# Altium PCB sigmaDeltaAUX.PcbDoc
Units mm, origin at the board's own origin, x right, y up, seen from the top; angles counter-clockwise.
Board outline 100 x 100.07 mm, 2 copper layers (Top Layer, Bottom Layer); 68 components, 44 nets, 244 pads, 40 vias.
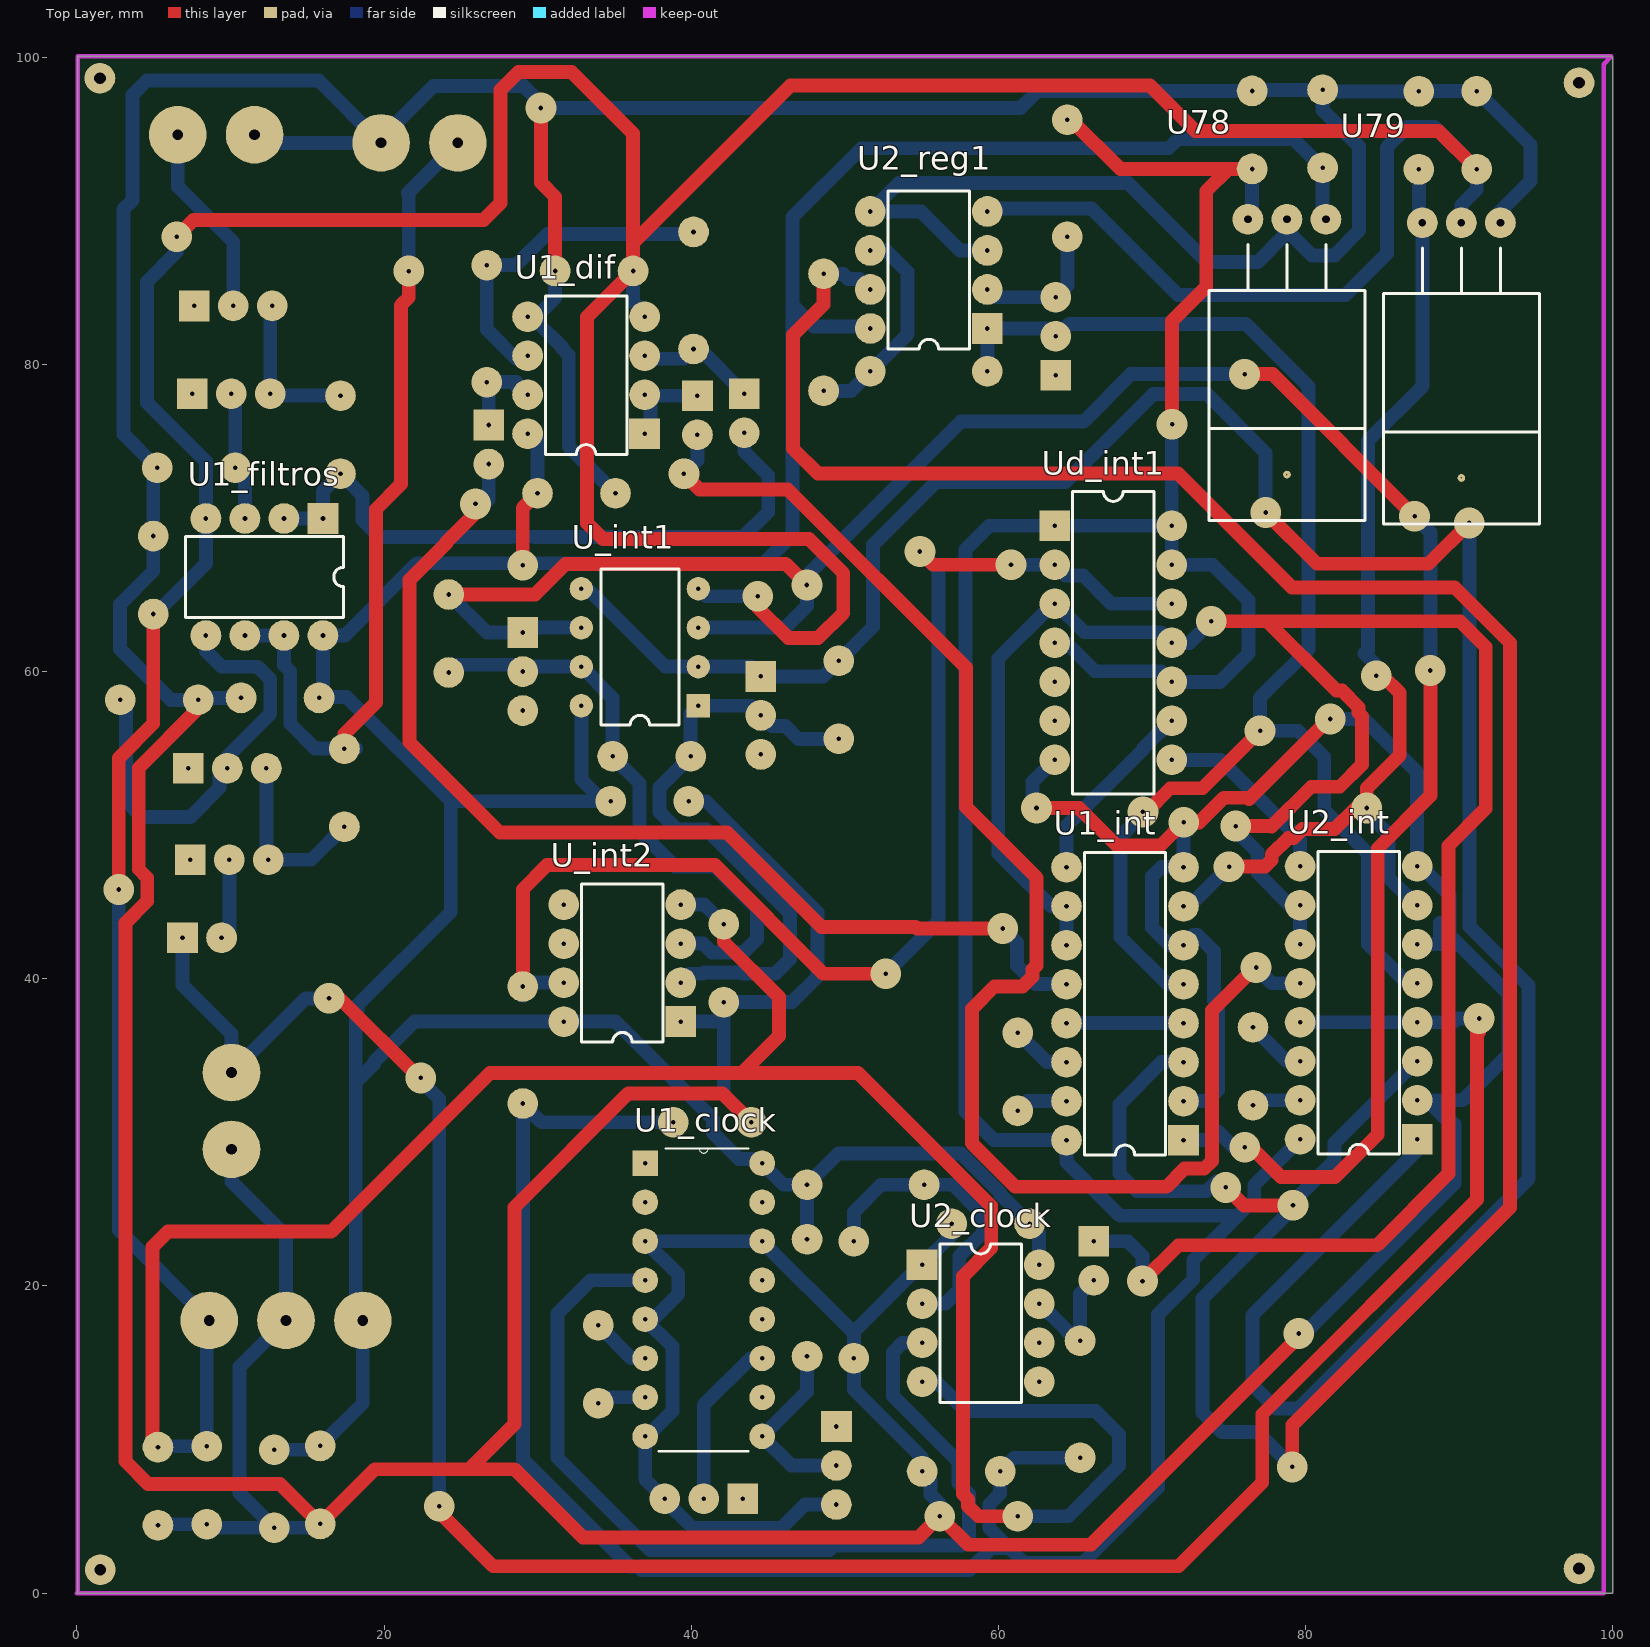
[diagram p0: Top Layer view]
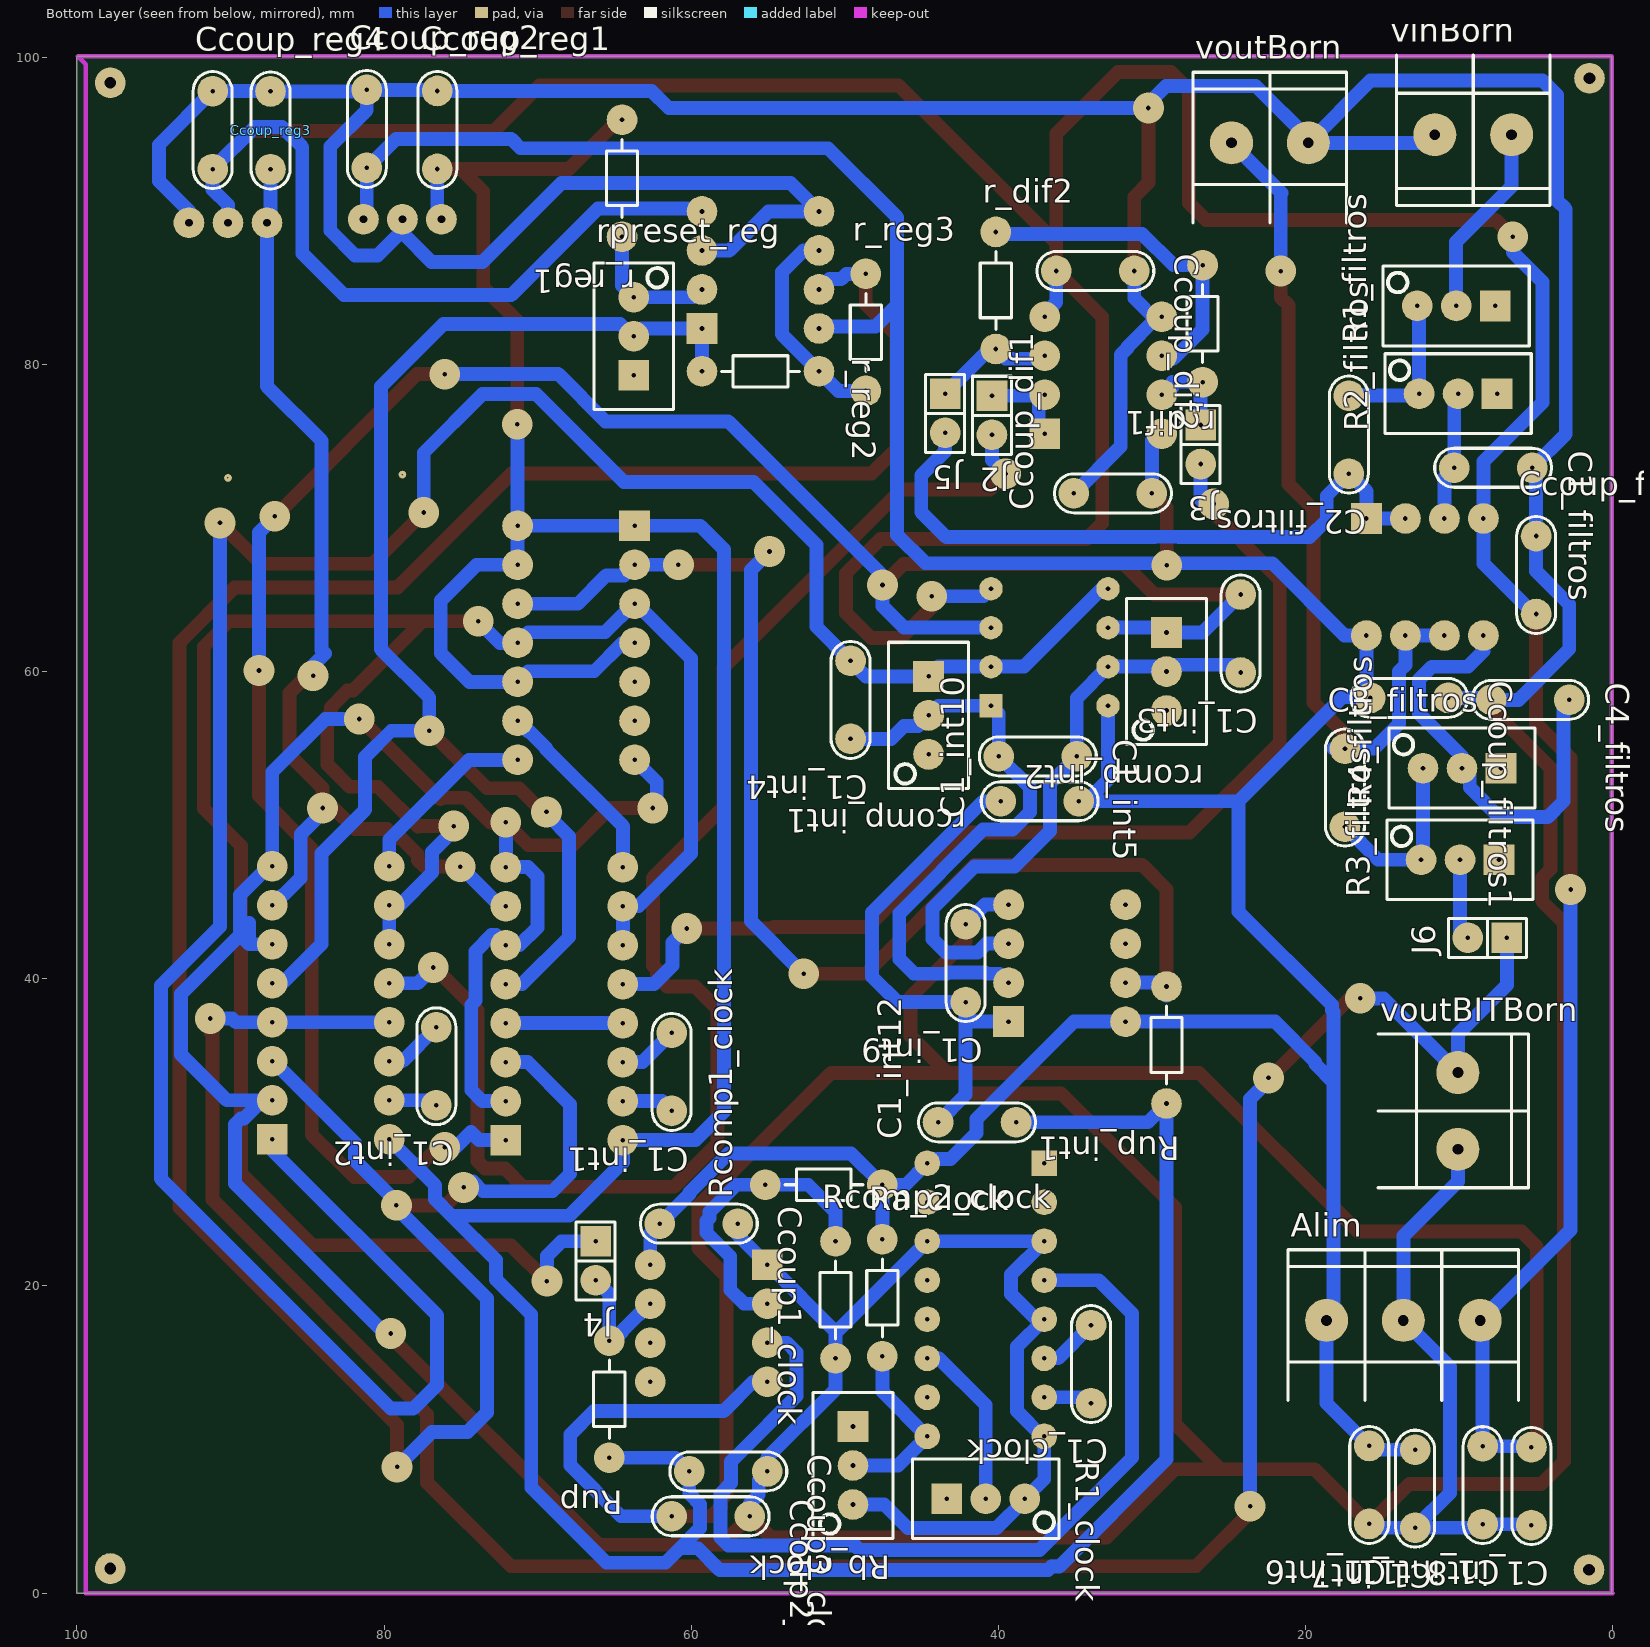
[diagram p1: Bottom Layer view, seen from below]
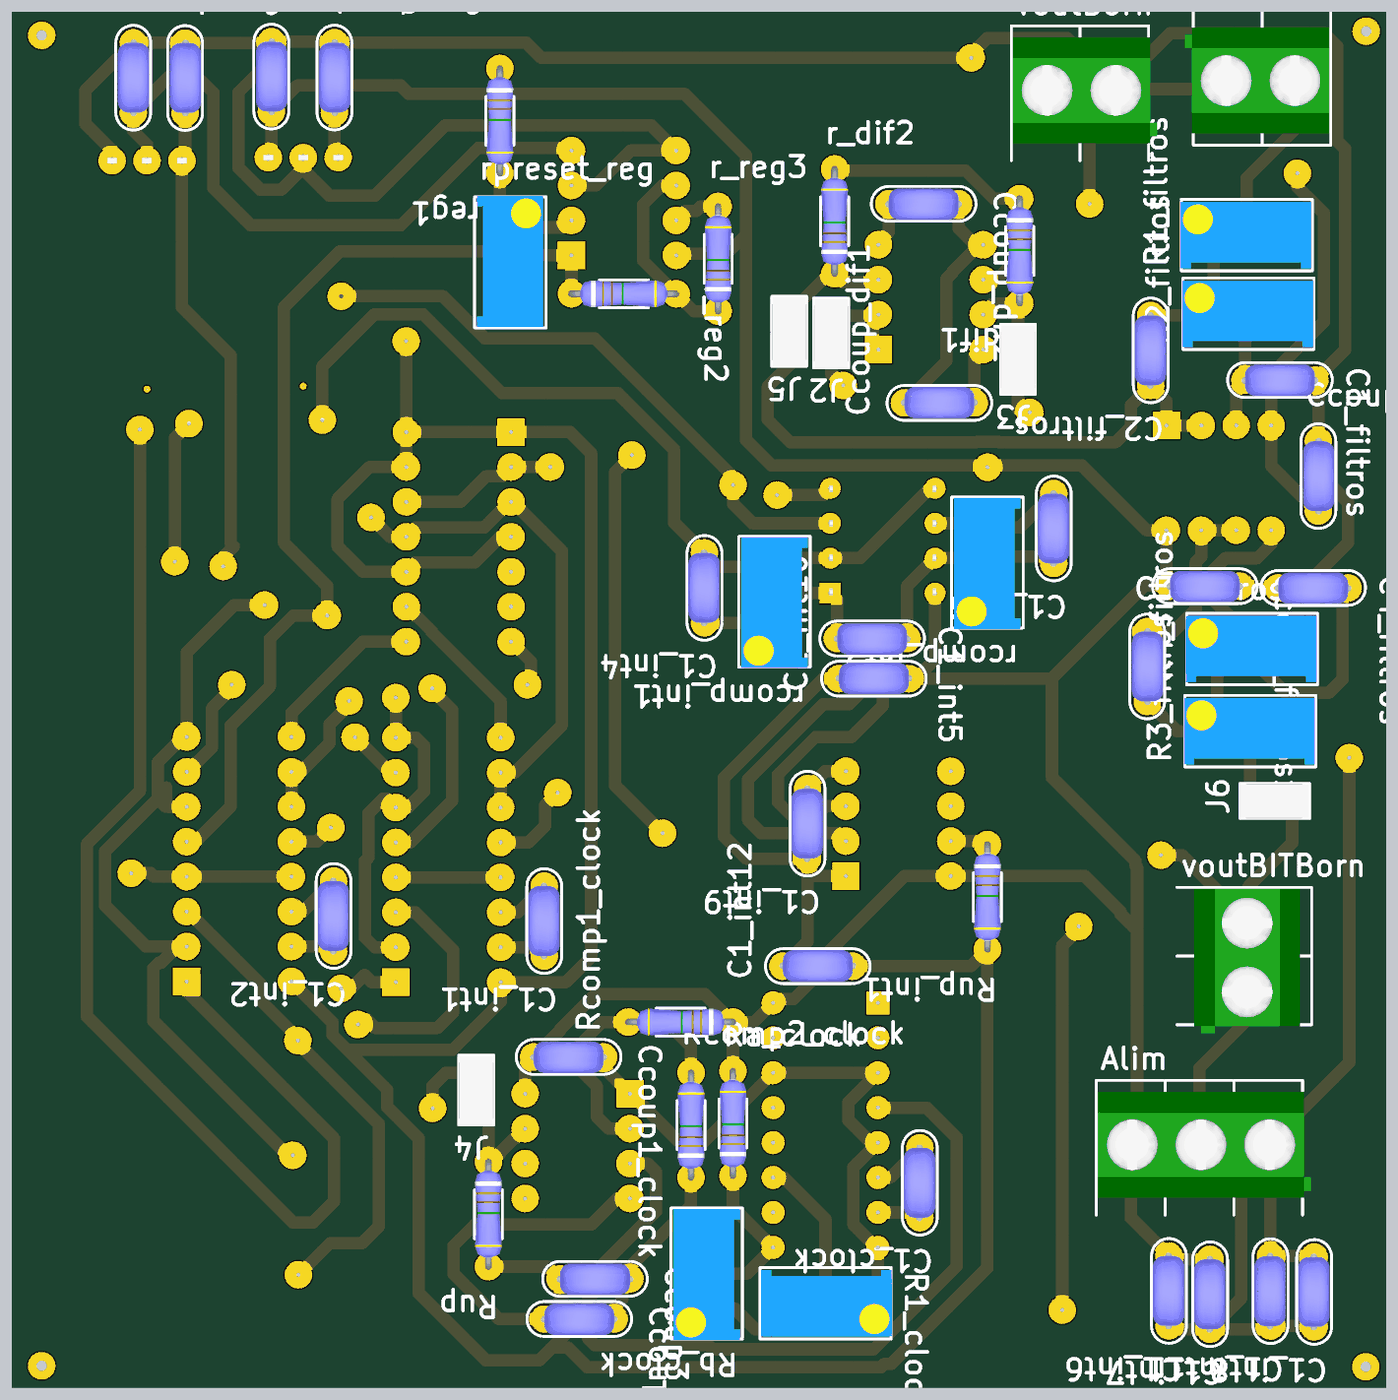
[diagram p2: 3D render of the assembled board from below, using the file's embedded part models]

## Layer stack, top to bottom
Top Solder: solder mask 0.0102, Solder Resist, Dk 3.5
Top Layer: signal copper 0.0356
Dielectric 1: dielectric 0.32, FR-4, Dk 4.8
Bottom Layer: signal copper 0.0356
Bottom Solder: solder mask 0.0102, Solder Resist, Dk 3.5

## Board outline
100,100 99.93,100.07 0.05,100.07 0.05,0.05 0,0 100,0

## Design rules (kind name [scope] priority, off if disabled: settings)
Clearance [All] p1: gap=0.4 ignorepadtopadclearanceinfootprint=FALSE
PolygonConnect [All] p1: connectstyle=Relief reliefconductorwidth=0.254 reliefentries=4 polygonreliefangle="90 Angle" airgapwidth=0.254
RoutingVias [All] p1: holewidth=0.3 width=2 viastyle="Through Hole" minholewidth=0.3 minwidth=2 maxholewidth=0.3 maxwidth=2
SolderMaskExpansion [All] p1: expansion=0.102
Width [All] p1: maxlimit=1.2 minlimit=0.8 preferedwidth=0.9
30 further rules are at their usual default settings.

## Classes and differential pairs
component class clock: C1_clock Ccoup1_clock Ccoup2_clock Ccoup3_clock R1_clock Ra_clock Rb_clock Rcomp1_clock Rcomp2_clock Rup U1_clock U2_clock
component class diferencial: Ccoup_dif1 Ccoup_dif2 r_dif1 r_dif2 U1_dif
component class filtros: C1_filtros C2_filtros C3_filtros C4_filtros Ccoup_filtros1 Ccoup_filtros2 R1_filtros R2_filtros R3_filtros R4_filtros U1_filtros
component class integrator: C1_int1 C1_int2 C1_int3 C1_int4 C1_int5 C1_int6 C1_int7 C1_int8 C1_int9 C1_int10 C1_int11 C1_int12 rcomp_int1 rcomp_int2 Rup_int1 U1_int U2_int U_int1 U_int2 Ud_int1
component class regulador: Ccoup_reg1 Ccoup_reg2 Ccoup_reg3 Ccoup_reg4 r_reg1 r_reg2 r_reg3 rpreset_reg U2_reg1 U78 U79
component class sigmaDeltaComplete: Alim J2 J3 J4 J5 J6 vinBorn voutBITBorn voutBorn

## Components (designator, comment, footprint, x,y, rotation, side; value= is the part's Value field where it differs from the comment)
Alim "BORNERA 3" BORNERA3 13.62,17.76 r270 bottom
C1_clock "220p" CAP200 33.959,14.91 r270 bottom
C1_filtros "CAP" CAP200 7.77,73.282 r180 bottom
C1_int1 "330p" CAP200 61.269,33.942 r270 bottom
C1_int2 "330p" CAP200 76.59,34.31 r270 bottom
C1_int3 "330p" CAP200 24.218,62.49 r270 bottom
C1_int4 "330p" CAP200 49.62,58.17 r270 bottom
C1_int5 "100n" CAP200 37.426,54.489 r180 bottom
C1_int6 "CAP" CAP200 15.842,7.045 r270 bottom
C1_int7 "CAP" CAP200 12.85,6.8 r270 bottom
C1_int8 "CAP" CAP200 5.28,6.97 r270 bottom
C1_int9 "CAP" CAP200 42.125,41.027 r270 bottom
C1_int10 "CAP" CAP200 37.299,51.568 r0 bottom
C1_int11 "CAP" CAP200 8.46,7.03 r270 bottom
C1_int12 "CAP" CAP200 41.38,30.66 r0 bottom
C2_filtros "1n" CAP200 17.168,75.441 r270 bottom
C3_filtros "1n" CAP200 17.422,52.454 r90 bottom
C4_filtros "1n" CAP200 5.357,58.169 r180 bottom
Ccoup1_clock "CAP" CAP200 59.5,24.06 r180 bottom
Ccoup2_clock "CAP" CAP200 58.724,5.004 r180 bottom
Ccoup3_clock "CAP" CAP200 57.581,7.925 r180 bottom
Ccoup_dif1 "CAP" CAP200 32.536,71.62 r0 bottom
Ccoup_dif2 "CAP" CAP200 33.679,86.098 r180 bottom
Ccoup_filtros1 "CAP" CAP200 13.231,58.296 r180 bottom
Ccoup_filtros2 "CAP" CAP200 4.976,66.297 r90 bottom
Ccoup_reg1 "CAP" CAP200 76.53,95.28 r90 bottom
Ccoup_reg2 "CAP" CAP200 81.12,95.35 r90 bottom
Ccoup_reg3 "CAP" CAP200 87.39,95.25 r90 bottom
Ccoup_reg4 "CAP" CAP200 91.16,95.27 r90 bottom
J2 "dif+" JUMPER2 40.41,76.7 r270 bottom
J3 "dif-" JUMPER2 26.821,74.795 r270 bottom
J4 "clkJump" JUMPER2 66.217,21.641 r270 bottom
J5 "inFiltered" JUMPER2 43.458,76.827 r270 bottom
J6 "inFRJump" JUMPER2 8.151,42.675 r0 bottom
R1_clock "PRESET25k" "PRESET V" 40.817,6.147 r180 bottom
R1_filtros "PRESET50k" "PRESET V" 10.183,83.823 r0 bottom
R2_filtros "PRESET50k" "PRESET V" 10.056,78.108 r0 bottom
R3_filtros "PRESET50k" "PRESET V" 9.929,47.755 r0 bottom
R4_filtros "PRESET50k" "PRESET V" 9.802,53.724 r0 bottom
r_dif1 "1k" RES300 26.694,86.479 r270 bottom
r_dif2 "1k" RES300 40.156,81.018 r90 bottom
r_reg1 "RES" RES300 64.499,95.942 r270 bottom
r_reg2 "RES" RES300 59.292,79.559 r180 bottom
r_reg3 "RES" RES300 48.624,78.289 r90 bottom
Ra_clock "10k" RES300 47.548,15.418 r90 bottom
Rb_clock "PRESET100k" "PRESET V" 49.46,8.31 r270 bottom
Rcomp1_clock "10k" RES300 47.548,26.594 r0 bottom
Rcomp2_clock "10k" RES300 50.596,15.291 r90 bottom
rcomp_int1 "PRESET100k" "PRESET V" 44.538,57.156 r270 bottom
rcomp_int2 "PRESET100k" "PRESET V" 29.044,60.013 r270 bottom
rpreset_reg "PRESET" "PRESET V" 63.737,81.845 r90 bottom
Rup "1k" RES300 65.328,16.434 r270 bottom
Rup_int1 "10k" RES300 29.044,39.503 r270 bottom
U1_clock "CD4046BE" DIP254P762X508-16 44.627,10.211 r0 top
U1_dif "TL082JG" JG008 33.16,79.31 r90 top
U1_filtros "TL082JG" JG008 12.215,66.17 r180 top
U1_int "MC14053BCP" 648-08 68.254,38.387 r90 top
U2_clock "LM111JG" JG008 58.851,17.577 r270 top
U2_int "MC14053BCP" 648-08 83.466,38.441 r90 top
U2_reg1 "TL082JG" JG008 55.482,86.163 r90 top
U78 "78XX" "TO-220 H" 78.8,81.84 r180 top
U79 "79XX" "TO-220 H" 90.16,81.62 r180 top
U_int1 "LM833" DIP8 40.472,57.791 r180 top
U_int2 "LM111JG" JG008 35.521,41.027 r90 top
Ud_int1 "MC74HC74AN" 646-06 67.492,61.882 r270 top
vinBorn "BORNERA 2" BORNERA2 9.07,94.97 r90 bottom
voutBITBorn "BORNERA 2" BORNERA2 10.07,31.4 r0 bottom
voutBorn "BORNERA 2" BORNERA2 22.31,94.44 r270 bottom

## Footprints (in the part's own frame and the unit in brackets; to place one, negate y for a bottom-side part, rotate by r counter-clockwise, add the part's x,y. Pads: shape width x height; smd on the part's side, far side on the other; paste and mask are expansions set on the pad)
646-06 [mm] "DIP; 14 Leads; Row Spacing 7.62 mm; Pitch 2.54 mm"
  rect 2x2 hole 0.3: 1(-7.62,-3.81)
  round 2 hole 0.3: 2(-5.08,-3.81) 3(-2.54,-3.81) 4(0,-3.81) 5(2.54,-3.81) 6(5.08,-3.81) 7(7.62,-3.81) 8(7.62,3.81) 9(5.08,3.81) 10(2.54,3.81) 11(0,3.81) 12(-2.54,3.81) 13(-5.08,3.81) 14(-7.62,3.81)
  silkscreen extent -9.85,-2.65 9.85,2.65
648-08 [mm] "DIP; 16 Leads; Row Spacing 7.62 mm; Pitch 2.54 mm"
  rect 2x2 hole 0.3: 1(-8.89,-3.81)
  round 2 hole 0.3: 2(-6.35,-3.81) 3(-3.81,-3.81) 4(-1.27,-3.81) 5(1.27,-3.81) 6(3.81,-3.81) 7(6.35,-3.81) 8(8.89,-3.81) 9(8.89,3.81) 10(6.35,3.81) 11(3.81,3.81) 12(1.27,3.81) 13(-1.27,3.81) 14(-3.81,3.81) 15(-6.35,3.81) 16(-8.89,3.81)
  silkscreen extent -9.85,-2.65 9.85,2.65
BORNERA2 [mm] "Bornera con Tornillos 5mm separación"
  round 2.8 / inner round 3.75 / far side round 3.75 hole 0.7: 1(0,2.5) 2(0,-2.5)
  silkscreen extent -4.6,-5 5.2,5, body extent -3.76,-4.89 3.94,5.61, height 10
BORNERA3 [mm] "Bornera con Tornillos 5mm separación"
  round 2.8 / inner round 3.75 / far side round 3.75 hole 0.7: 1(0,5) 2(0,0) 3(0,-5)
  silkscreen extent -4.6,-7.5 5.2,7.5, body extent -3.76,-7.39 3.94,8.11, height 10.05
CAP200 [mm]
  round 2 hole 0.3: 1(-2.54,0) 2(2.54,0)
  silkscreen extent -3.81,-1.27 3.81,1.27, body extent -2.79,-1.17 2.79,1.12, height 6.24
DIP8 [mil]
  rect 60x60 hole 11.81: 1(0,0)
  round 60 hole 11.81: 2(0,-100) 3(0,-200) 4(0,-300) 5(300,-300) 6(300,-200) 7(300,-100) 8(300,0)
  silkscreen extent 50,-350 250,50, body extent -3,-363 303,63, height 177
DIP254P762X508-16 [mil]
  rect 66x66 hole 11.81: 1(-300,700)
  round 66 hole 11.81: 2(-300,600) 3(-300,500) 4(-300,400) 5(-300,300) 6(-300,200) 7(-300,100) 8(-300,0) 9(0,0) 10(0,100) 11(0,200) 12(0,300) 13(0,400) 14(0,500) 15(0,600) 16(0,700)
  silkscreen extent -265,-38 -35,738
JG008 [mm] "DIP; 8 Leads; Row Spacing 7.62 mm; Pitch 2.54 mm"
  rect 2x2 hole 0.3: 1(-3.81,-3.81)
  round 2 hole 0.3: 2(-1.27,-3.81) 3(1.27,-3.81) 4(3.81,-3.81) 5(3.81,3.81) 6(1.27,3.81) 7(-1.27,3.81) 8(-3.81,3.81)
  silkscreen extent -5.15,-2.65 5.15,2.65
JUMPER2 [mm]
  rect 2x2 hole 0.3: 1(-1.27,0)
  round 2 hole 0.3: 2(1.27,0)
  silkscreen extent -2.54,-1.27 2.54,1.27, body extent -2.46,-1.27 2.54,1.27, height 9.5
"PRESET V" [mm]
  rect 2x2 hole 0.3: 1(-2.54,0)
  round 2 hole 0.3: 2(0,0) 3(2.54,0)
  silkscreen extent -4.76,-2.6 4.76,2.6, body extent -4.7,-2.42 4.83,2.42, height 11.55
RES300 [mm]
  round 2 hole 0.3: 1(0,0) 2(7.62,0)
  silkscreen extent 1.27,-1.02 6.35,1.02, body extent -0.25,-0.97 7.87,0.97, height 2.01
"TO-220 H" [mm]
  round 2 hole 0.5: 1(-2.54,-7.62) 2(0,-7.62) 3(2.54,-7.62)
  round 0.5 hole 0.1: 4(0,9)
  silkscreen extent -5.08,-5.97 5.08,12, body extent -5.08,-7.81 5.08,11.47, height 4.45

## Part data
C1_clock C1_int1 C1_int2 C1_int3 C1_int4 C1_int5 C2_filtros C3_filtros C4_filtros: library part CAP
J2 J3 J4 J5 J6: library part JUMPER
R1_clock R1_filtros R2_filtros R3_filtros R4_filtros Rb_clock rcomp_int1 rcomp_int2: library part PRESET
r_dif1 r_dif2 Ra_clock Rcomp1_clock Rcomp2_clock Rup Rup_int1: library part RES
U1_clock: "Logic - Phase-Locked-Loops and Oscillators Micropower PLL", Package="PDIP-16 Texas Instruments", Availability=Unavailable, MF="Texas Instruments", MP=CD4046BE, Price=None, SnapEDA_Link=https://www.snapeda.com/parts/CD4046BE/Texas%20Instruments/view-part/?ref=snap
U1_dif U1_filtros U2_reg1: "JFET-Input Operational Amplifier", ComponentLink1Description="Manufacturer Link", ComponentLink1URL=http://www.ti.com/, ComponentLink2Description=Datasheet, ComponentLink2URL=http://www-s.ti.com/sc/ds/tl082.pdf, DatasheetVersion=Feb-1999, LatestRevisionDate=04-Mar-2005, LatestRevisionNote="Stylized 3D Model Added.", PackageDescription="DIP; 8 Leads; Row Spacing 7.62 mm; Pitch 2.54 mm", PackageReference=JG008, PackageVersion=Jan-1995, Published=16-Jan-2001, Publisher="Altium Limited"
U1_int U2_int: "Triple 2-Channel Analog Multiplexer/Demultiplexer", Code_JEDEC=MS-001-BB, ComponentLink1Description="Manufacturer Link", ComponentLink1URL=http://www.onsemi.com/, ComponentLink2Description=Datasheet, ComponentLink2URL=http://www.onsemi.com/pub/Collateral/MC14051B-D.PDF, DatasheetVersion=1995, PackageDescription="DIP; 16 Leads; Row Spacing 7.62 mm; Pitch 2.54 mm", PackageReference=648-08, PackageVersion=Apr-2000, Published=15-Apr-2002, Publisher="Altium Limited"
U2_clock U_int2: "Differential Comparator with Strobe", ComponentLink1Description="Manufacturer Link", ComponentLink1URL=http://www.ti.com/, ComponentLink2Description=Datasheet, ComponentLink2URL=http://www-s.ti.com/sc/ds/lm111.pdf, DatasheetVersion=Feb-1992, LatestRevisionDate=04-Mar-2005, LatestRevisionNote="Stylized 3D Model Added.", PackageDescription="DIP; 8 Leads; Row Spacing 7.62 mm; Pitch 2.54 mm", PackageReference=JG008, PackageVersion=Jan-1995, Published=16-Jan-2001, Publisher="Altium Limited"
U78: "REGULDOR POSITIVO"
U79: "REGULADOR NEGATIVO"
U_int1: "Dual Audio Operational Amplifier"
Ud_int1: "Dual D-Type Flip-Flop with Set and Reset", ComponentLink1Description="Manufacturer Link", ComponentLink1URL=http://www.onsemi.com/, ComponentLink2Description=Datasheet, ComponentLink2URL=http://www.onsemi.com/pub/Collateral/MC74HC74A-D.PDF, DatasheetVersion=Mar-2000, PackageDescription="DIP; 14 Leads; Row Spacing 7.62 mm; Pitch 2.54 mm", PackageReference=646-06, PackageVersion=1995, Published=15-Apr-2002, Publisher="Altium Limited"

## Free pads (board coordinates)
  round 2 hole 0.762: 2(97.82,98.35) 3(97.82,1.6) 4(1.53,1.53) 5(1.5,98.65)

## Via types
v1: diameter 2, hole 0.3, Top Layer to Bottom Layer, 40 vias

## Nets (pads, with @x,y where several pads share a name; then routed paths per layer and width w, separated by ;. In a path a pad name is that pad's centre, name@x,y a point inside that pad or via, vN(x,y) a via of type N, cw(c..) or ccw(c..) an arc to the next point about the centre after c; other vN are vias at no path point)
+Valim: Alim.3 C1_int6.1 C1_int7.1 C1_int10.1 Ccoup1_clock.1 Ccoup_dif1.1 Ccoup_filtros1.1 Ccoup_reg2.1 Ra_clock.2 Rcomp1_clock.1 U1_clock.16 U1_dif.8 U1_filtros.8 U2_clock.8 U2_reg1.8 U78.1 U_int1.8 U_int2.8 | length 251.5
  Top Layer w0.9: v1(29.03,66.94) 29.03,70.654 Ccoup_dif1.1
  Bottom Layer w0.9: C1_int7.1 15.597,9.34 C1_int6.1 18.62,12.363 Alim.3 18.16,18.22 18.16,33.26 ; Ccoup_filtros1.1 Ccoup_filtros1.1@15.825,58.35 ; U1_dif.8@29.742,75.303 29.996,75.049 Ccoup_dif1.1 ; U_int1.8 32.852,52.967 C1_int10.1@34.251,51.568 ; C1_int10.1 C1_int10.1@34.251,51.568 ; Ra_clock.2@47.548,22.53 Ra_clock.2 Rcomp1_clock.1 ; U2_reg1.8@51.596,82.353 U2_reg1.8 51.545,82.48 47.989,82.48 46.592,83.877 ; U2_clock.8 62.661,23.439 Ccoup1_clock.1 60.11,25.99 60.11,26.08 57.564,28.626 49.58,28.626 Rcomp1_clock.1 ; U78.1 81.12,89.68 Ccoup_reg2.1 79.23,94.7 71.71,94.7 71.102,94.092 51.082,94.092 46.592,89.602 46.592,83.877 ; Ccoup_filtros1.1@15.825,58.35 16.025,58.55 U1_filtros.8 17.45,62.36 22.16,67.07 44.75,67.07 46.592,68.912 46.592,83.877 ; Ccoup_filtros1.1@15.825,58.35 17.57,58.35 24.352,51.568 ; 18.16,33.26 18.16,37.854 18.27,37.964 18.27,38.29 24.352,44.372 24.352,51.568 ; 18.16,33.26 19.36,34.46 19.36,34.594 21.983,37.217 U_int2.8 35.073,37.217 41.418,30.872 41.418,29.972 43.12,28.27 44.348,28.27 U1_clock.16 46.024,26.594 Rcomp1_clock.1 ; 24.352,51.568 C1_int10.1@34.251,51.568
+Vin: J2.2 U2_int.12 | length 96.8
  Top Layer w0.9: v1(39.53,72.89) 40.55,71.87 46.29,71.87 57.89,60.27 57.89,51.19 62.49,46.59 62.49,40.88 62.22,40.61 62.22,40.16 61.57,39.51 59.74,39.51 58.28,38.05 58.28,29.29 61.11,26.46 70.944,26.46 72.131,27.647 73.416,27.647 73.914,28.145 73.914,37.934 76.72,40.74 v1(76.79,40.74)
  Bottom Layer w0.9: v1(39.53,72.89) 40.41,73.77 J2.2 ; v1(76.79,40.74) 77.819,39.711 U2_int.12
+Voffset: r_reg3.2 U1_int.3 U2_int.3 U2_reg1.7 | length 184.4
  Top Layer w0.9: r_reg3.2 48.624,83.904 46.64,81.92 46.64,74.52 48.25,72.91 71.7,72.91 79.13,65.48 89.728,65.48 93.32,61.888 93.32,25.12 79.15,10.95 v1(79.15,8.22) v1@79.15,8.12 ; v1(74.82,26.42) 75.99,25.25 v1(79.19,25.25)
  Bottom Layer w0.9: r_reg3.2 49.894,85.909 50.22,85.583 50.982,85.583 U2_reg1.7 ; U1_int.3 70.637,34.577 67.89,31.83 67.89,27.31 69.03,26.17 73.57,26.17 v1@74.2,26.8 ; v1(79.15,8.22) 76.87,10.5 74.55,10.5 73.29,11.76 73.29,19.182 79.19,25.082 v1(79.19,25.25) ; v1@79.48,25.75 81.89,28.16 81.89,29.321 87.2,34.631 U2_int.3
+Vout: J2.1 U1_dif.1 U1_dif.2 | length 5.6
  Bottom Layer w0.9: U1_dif.1@37.362,75.303 37.362,77.843 37.489,77.97 J2.1
+Vref: C1_int12.1 Ccoup3_clock.1 Ccoup_reg1.1 r_reg1.1 Rup.2 Rup_int1.2 U1_int.16 U2_int.16 U78.3 Ud_int1.1 Ud_int1.4 Ud_int1.10 Ud_int1.13 Ud_int1.14 | length 258.7
  Top Layer w0.9: r_reg1.1 64.748,95.942 67.95,92.74 74.99,92.74 ; v1(71.32,76.12) 71.32,82.844 73.54,85.064 73.54,91.29 74.99,92.74 ; Ccoup_reg1.1 74.99,92.74
  Bottom Layer w0.9: C1_int12.1 30.267,30.66 Rup_int1.2 29.044,8.716 36.025,1.735 36.533,1.735 36.768,1.5 58.14,1.5 59.56,2.92 60.732,2.92 ; Ud_int1.4 64.46,61.882 66.31,60.032 70.612,60.032 Ud_int1.10 74.442,59.342 76.3,61.2 76.3,64.63 73.968,66.962 Ud_int1.13 Ud_int1.14 ; Rup.2 61.01,8.814 Ccoup3_clock.1 60.121,6.477 59.414,5.77 59.414,4.238 60.732,2.92 ; v1(71.32,76.12) 71.302,76.102 Ud_int1.14 ; U78.3 76.53,89.73 Ccoup_reg1.1 ; U2_int.16 76.67,26.565 76.67,25.654 75.586,24.57 ; 60.732,2.92 61.672,1.98 65.505,1.98 70.41,6.885 70.41,18.14 72.7,20.43 72.7,21.684 75.586,24.57 ; Ud_int1.14 Ud_int1.1 59.402,69.502 57.86,67.96 57.86,31.35 59.713,29.497 U1_int.16 64.444,28.066 67.94,24.57 75.586,24.57
-Valim: Alim.1 C1_int8.1 C1_int9.1 C1_int11.1 Ccoup2_clock.1 Ccoup_dif2.1 Ccoup_filtros2.1 Ccoup_reg4.1 U1_dif.4 U1_filtros.4 U2_clock.4 U2_reg1.4 U79.2 U_int1.4 U_int2.4 | length 441.5
  Top Layer w0.9: v1(2.73,45.82) 2.73,54.382 4.976,56.628 Ccoup_filtros2.1 ; C1_int8.1 4.93,9.86 4.93,22.54 5.93,23.54 16.57,23.54 26.91,33.88 43.31,33.88 ; v1(6.5,88.32) 7.6,89.42 26.48,89.42 27.58,90.52 27.58,97.88 28.75,99.05 32.21,99.05 36.219,95.041 36.219,87.909 ; C1_int9.1 42.125,42.415 45.72,38.82 45.72,36.29 43.31,33.88 ; v1(44.34,64.92) 44.34,64.18 46.33,62.19 48.27,62.19 49.91,63.83 49.91,66.412 47.682,68.64 34.26,68.64 33.226,69.674 33.226,83.105 Ccoup_dif2.1 36.219,87.909 ; Ccoup2_clock.1 58.706,5.004 58.034,5.676 58.034,6.104 57.7,6.438 57.7,20.63 59.54,22.47 59.54,25.22 50.88,33.88 43.31,33.88 ; Ccoup_reg4.1 88.68,95.21 72.84,95.21 69.88,98.17 46.48,98.17 36.219,87.909
  Bottom Layer w0.9: v1(2.73,45.82) 2.73,23.65 Alim.1 8.46,17.6 C1_int11.1 5.34,9.57 C1_int8.1 ; Ccoup_filtros2.1 5.103,63.757 8.405,67.059 U1_filtros.4 8.405,73.695 4.56,77.54 4.56,85.38 6.5,87.32 v1(6.5,88.32) ; Ccoup_dif2.1 36.219,84.066 U1_dif.4@37.362,82.923 ; U_int2.4@39.255,44.837 U_int2.4 40.855,44.837 C1_int9.1 ; U_int1.4 40.963,64.92 v1(44.34,64.92) ; U2_clock.4 55.967,13.767 57.872,11.862 66.344,11.862 67.868,10.338 67.868,8.306 64.566,5.004 Ccoup2_clock.1 ; U2_reg1.4 59.292,90.172 66.068,90.172 71.71,84.53 82.61,84.53 85.32,87.24 85.32,94.16 86.64,95.48 88.41,95.48 Ccoup_reg4.1 91.16,91.41 90.16,90.41 U79.2
-Vin: J3.2 U1_int.12 | length 70.8
  Top Layer w0.9: v1(25.96,70.93) 25.96,70.35 24.07,68.46 24.07,68.38 21.67,65.98 21.67,55.41 27.54,49.54 42.34,49.54 48.5,43.38 54.61,43.38 54.71,43.28 v1(60.29,43.28)
  Bottom Layer w0.9: v1(25.96,70.93) 26.54,70.93 26.821,71.211 J3.2 ; v1(60.29,43.28) 61.21,42.36 61.21,40.87 62.423,39.657 U1_int.12
-Voffset: r_reg2.1 rpreset_reg.2 U1_int.5 U2_int.5 U2_reg1.1 | length 95.7
  Top Layer w0.9: v1(69.42,50.87) 69.66,50.87 71.202,52.412 73.302,52.412 v1(77.05,56.16)
  Bottom Layer w0.9: r_reg2.1 U2_reg1.1 63.229,82.353 rpreset_reg.2 63.813,81.845 64.618,82.65 76.12,82.65 80.2,78.57 80.2,61.46 77.05,58.31 v1(77.05,56.16) 79.53,56.16 81.23,54.46 81.23,51.01 84.08,48.16 84.08,42.28 86.649,39.711 U2_int.5 ; v1@69.24,50.56 67.96,49.28 67.96,42.71 71.013,39.657 U1_int.5
-Vout: J3.1 r_dif1.2 U1_dif.7 | length 6.5
  Bottom Layer w0.9: J3.1 26.821,78.732 r_dif1.2 28.65,78.859 28.65,78.533 29.052,78.533 U1_dif.7@29.742,77.843
-Vref: Ccoup_reg3.1 U1_int.7 U2_int.7 U79.3 | length 67.2
  Top Layer w0.9: v1(75.03,47.31) 77.37,47.31 77.806,47.746 77.806,48.097 78.89,49.181 79.241,49.181 79.81,49.75 81.9,49.75 83.28,51.13 v1(84,51.13) 84,52.432 86.15,54.582 86.15,58.62 85.04,59.73 v1(84.62,59.73)
  Bottom Layer w0.9: U1_int.7 72.457,44.737 v1(75.03,47.31) ; v1@84.243,50.597 85.426,49.414 85.426,46.565 86.51,45.481 86.586,45.481 U2_int.7 ; v1(84.62,59.73) 84.62,60.42 83.85,61.19 84.08,61.42 84.08,75.046 87.62,78.586 U79.3 87.39,89.47 Ccoup_reg3.1
analogResult1: U1_int.4 U1_int.13 | length 7.6
  Bottom Layer w0.9: U1_int.13 U1_int.4
analogResult2: J6.1 U2_int.4 U2_int.13 voutBITBorn.2 | length 160.6
  Top Layer w0.9: v1(16.42,38.73) 17.12,38.73 22.3,33.55 v1(22.4,33.55) ; v1@23.44,5.42 27.11,1.75 71.73,1.75 77.19,7.21 77.19,11.65 91.17,25.63 91.17,36.66 91.31,36.52 v1(91.31,37.42)
  Bottom Layer w0.9: J6.1 6.881,39.609 10.07,36.42 voutBITBorn.2 14.9,38.73 v1(16.42,38.73) ; v1(22.4,33.55) 22.4,33.37 23.6,32.17 v1(23.6,5.65) ; U2_int.13 U2_int.4 89.631,37.171 89.88,37.42 v1(91.31,37.42)
clk: J4.1 U1_int.10 U1_int.11 U2_int.10 U2_int.11 Ud_int1.3 Ud_int1.11 | length 152.2
  Top Layer w0.9: v1(69.39,20.32) 71.72,22.65 84.65,22.65 89.32,27.32 89.32,48.67 91.74,51.09 91.74,61.63 90.08,63.29 77.5,63.29 ; v1(73.87,63.29) 77.5,63.29 ; v1(75.46,49.95) 77.76,49.95 77.79,49.92 80.38,52.51 82.24,52.51 83.69,53.96 83.69,57.1 83.46,57.33 83.46,57.686 82.376,58.77 82.02,58.77 77.5,63.29
  Bottom Layer w0.9: U1_int.11 U1_int.10 63.428,44.737 59.999,48.166 59.999,60.866 63.555,64.422 Ud_int1.3 63.758,64.422 65.608,62.572 70.612,62.572 Ud_int1.11 72.462,61.882 v1(73.87,63.29) ; J4.1 68.439,22.911 69.39,21.96 v1(69.39,20.32) ; v1@74.96,50.08 75.069,50.08 76.88,48.269 76.88,46.91 78.999,44.791 U2_int.10 U2_int.11
clockSignal: J4.2 Rup.1 U2_clock.7 | length 8
  Bottom Layer w0.9: U2_clock.7 63.351,18.157 63.427,18.157 64.511,17.073 64.511,16.997 65.074,16.434 Rup.1 65.328,19.482 J4.2
GND: Alim.2 C1_filtros.2 C1_int6.2 C1_int7.2 C1_int8.2 C1_int9.2 C1_int10.2 C1_int11.2 C1_int12.2 C4_filtros.1 Ccoup1_clock.2 Ccoup2_clock.2 Ccoup3_clock.2 Ccoup_dif1.2 Ccoup_dif2.2 Ccoup_filtros1.2 Ccoup_filtros2.2 Ccoup_reg1.2 Ccoup_reg2.2 Ccoup_reg3.2 Ccoup_reg4.2 R1_clock.3 Rb_clock.3 Rcomp2_clock.1 U1_clock.3 U1_clock.5 U1_clock.8 U1_clock.14 U1_dif.5 U1_int.2 U1_int.6 U1_int.8 U2_clock.1 U2_int.2 U2_int.6 U2_int.8 U2_reg1.3 U2_reg1.5 U78.2 U79.1 U_int2.1 Ud_int1.7 vinBorn.1 voutBITBorn.1 voutBorn.1 | length 681.8
  Top Layer w0.9: C4_filtros.1 7.897,57.597 4.03,53.73 4.03,47.136 4.58,46.586 4.58,45.054 3.16,43.634 3.16,8.59 4.64,7.11 13.237,7.11 C1_int6.2 19.407,8.07 25.57,8.07 ; v1(30.22,96.71) 30.22,91.85 31.139,90.931 Ccoup_dif2.2 ; C1_int12.2 42.05,32.53 35.9,32.53 28.5,25.13 28.5,11 25.57,8.07 ; v1(62.49,51.13) 65.27,51.13 67.7,48.7 70.58,48.7 v1(72.07,50.19) 73.084,50.19 74.694,51.8 76.226,51.8 76.318,51.708 v1@81.33,56.72 ; v1(79.56,16.91) 79.79,16.91 66.034,3.154 58.034,3.154 Ccoup2_clock.2 54.8,3.62 32.95,3.62 28.5,8.07 25.57,8.07
  Bottom Layer w0.9: C1_int8.2 5.34,4.49 C1_int11.2 8.69,4.26 C1_int7.2 ; voutBITBorn.1 10.07,26.81 13.62,23.26 Alim.2 10.58,14.72 10.58,6.53 C1_int7.2 ; Ccoup_filtros1.2 8.024,58.296 C4_filtros.1 6.119,58.169 2.817,61.471 2.817,64.392 4.976,66.551 Ccoup_filtros2.2 4.976,73.028 C1_filtros.2 3.04,75.472 3.04,90.12 3.62,90.7 3.62,97.57 4.55,98.5 15.75,98.5 voutBorn.1 ; vinBorn.1 12.1,94.44 voutBorn.1 ; C1_int6.2 15.597,4.26 C1_int7.2 ; v1(30.22,96.71) 61.46,96.71 62.57,97.82 Ccoup_reg1.2 76.6,97.89 Ccoup_reg2.2 ; v1@30.22,97.01 29.08,98.15 23.23,98.15 19.81,94.73 voutBorn.1 ; Ccoup_dif2.2 31.139,84.32 29.742,82.923 29.818,82.923 31.592,81.149 31.592,81.073 32.028,80.637 32.028,74.668 Ccoup_dif1.2 ; U_int2.1 41.627,37.217 C1_int9.2@42.125,37.715 ; C1_int10.2 40.982,51.568 48.221,44.329 48.221,40.138 46.57,38.487 C1_int9.2 C1_int9.2@42.125,37.715 ; C1_int12.2 42.125,32.455 C1_int9.2@42.125,37.715 ; Rb_clock.3 47.425,5.77 45.895,4.24 40.108,4.24 38.277,6.071 R1_clock.3 37.007,7.417 U1_clock.8 37.134,10.211 38.785,11.862 38.785,16.053 U1_clock.5 37.515,17.831 39.166,19.482 39.166,20.752 U1_clock.3 U1_clock.14 50.596,16.942 ; Ccoup2_clock.2 56.184,5.833 55.591,6.426 55.591,7.375 Ccoup3_clock.2 55.041,8.819 50.596,13.264 Rcomp2_clock.1 50.596,16.942 ; Ccoup1_clock.2 56.96,23.306 U2_clock.1 54.965,21.387 50.596,17.018 50.596,16.942 ; U2_reg1.3 57.514,87.433 54.974,89.973 U2_reg1.5 53.522,91.823 68.447,91.823 73.58,86.69 76.91,86.69 78.65,88.43 78.65,89.31 U78.2 78.8,88.74 80.43,87.11 81.89,87.11 83.5,88.72 83.5,94.21 81.12,96.59 Ccoup_reg2.2 ; v1@62.24,51.2 62.24,52.82 Ud_int1.7 ; U1_int.2 73.607,32.037 74.32,32.75 74.32,38.306 74.05,38.576 74.05,41.79 72.99,42.85 72.717,42.85 U1_int.6 71.163,42.197 70.01,43.35 70.01,46.67 70.617,47.277 U1_int.8 v1@72.064,49.644 ; v1(79.56,16.91) 79.94,16.91 89.71,26.68 89.71,30.52 89.327,30.903 89.126,30.903 U2_int.2@87.938,32.091 ; v1(81.61,56.92) 83.82,56.92 87.276,53.464 U2_int.8 87.519,47.331 89.38,45.47 89.38,43.04 88.771,43.649 88.771,42.251 89.38,42.86 93.22,39.02 93.22,35.08 90.231,32.091 U2_int.2@87.938,32.091 ; U2_int.2 U2_int.2@87.938,32.091 ; U2_int.6 88.709,42.251 ; U79.1 92.7,90 94.65,91.95 94.65,94.32 Ccoup_reg4.2 87.41,97.81 Ccoup_reg3.2 81.22,97.79 Ccoup_reg2.2
inFR: J6.2 R3_filtros.2 | length 5.3
  Bottom Layer w0.9: J6.2 9.929,43.183 R3_filtros.2
NetC1_clock_1: C1_clock.1 U1_clock.6 | length 3.9
  Bottom Layer w0.9: C1_clock.1 36.118,15.291 U1_clock.6
NetC1_clock_2: C1_clock.2 U1_clock.7 | length 3.2
  Bottom Layer w0.9: C1_clock.2 34.34,12.751 U1_clock.7
NetC1_filtros_1: C1_filtros.1 R2_filtros.2 U1_filtros.3 | length 8.5
  Bottom Layer w0.9: R2_filtros.2 10.31,77.854 C1_filtros.1 10.945,72.647 U1_filtros.3
NetC1_int1_1: C1_int1.1 U1_int.14 | length 4
  Bottom Layer w0.9: C1_int1.1 63.174,34.577 U1_int.14
NetC1_int1_2: C1_int1.2 U1_int.15 | length 3.4
  Bottom Layer w0.9: C1_int1.2 61.904,32.037 U1_int.15
NetC1_int2_1: C1_int2.1 U2_int.14 | length 4
  Bottom Layer w0.9: C1_int2.1 78.809,34.631 U2_int.14
NetC1_int2_2: C1_int2.2 U2_int.15 | length 3.7
  Bottom Layer w0.9: C1_int2.2@76.1,31.71 C1_int2.2@76.481,32.091 ; C1_int2.2 76.911,32.091 U2_int.15
NetC1_int3_2: C1_int3.2 C1_int5.2 rcomp_int2.2 U_int1.7 U_int2.3 | length 38.4
  Bottom Layer w0.9: C1_int3.2 24.726,60.458 28.79,60.458 28.917,60.331 U_int1.7 34.886,58.297 C1_int5.2 36.634,52.741 36.634,49.633 38.95,47.317 41.557,47.317 44.284,44.589 44.284,42.604 43.397,41.717 41.359,41.717 40.779,42.297 U_int2.3
NetC1_int4_2: C1_int4.2 C1_int5.1 rcomp_int1.2 U_int1.1 U_int2.2 | length 40.1
  Bottom Layer w0.9: U_int2.2 39.911,40.337 40.779,40.337 40.859,40.417 43.257,40.417 43.337,40.337 45.499,40.337 46.443,41.281 46.443,44.269 40.994,49.718 39.073,49.718 37.934,50.857 37.934,52.457 C1_int5.1 39.966,57.285 U_int1.1 43.903,57.791 rcomp_int1.2 45.228,56.466 46.14,56.466 46.976,55.63 C1_int4.2
NetC2_filtros_1: C2_filtros.1 R1_filtros.3 R2_filtros.3 | length 10.4
  Bottom Layer w0.9: R1_filtros.3 12.596,83.696 R2_filtros.3 12.723,77.981 C2_filtros.1
NetC3_filtros_1: C3_filtros.1 R3_filtros.3 R4_filtros.3 | length 11.9
  Bottom Layer w0.9: R4_filtros.3 12.342,47.882 R3_filtros.3 15.263,47.755 C3_filtros.1
NetC4_filtros_2: C4_filtros.2 R4_filtros.2 U1_filtros.5 | length 28.4
  Bottom Layer w0.9: C4_filtros.2 3.198,57.788 3.198,51.565 4.214,50.549 7.389,50.549 9.294,52.454 9.294,53.216 R4_filtros.2 9.802,54.486 12.596,57.28 12.596,59.494 11.762,60.328 9.421,60.328 8.405,61.344 U1_filtros.5
NetJ5_1: J5.1 r_dif2.1 U1_dif.3 | length 7.6
  Bottom Layer w0.9: U1_dif.3@37.362,80.383 39.521,80.383 r_dif2.1 40.564,81.018 43.458,78.124 J5.1
NetR1_clock_2: R1_clock.2 U1_clock.11 | length 11.2
  Bottom Layer w0.9: R1_clock.2 40.817,12.243 43.865,15.291 U1_clock.11
NetR1_filtros_2: R1_filtros.2 vinBorn.2 | length 12.6
  Bottom Layer w0.9: vinBorn.2 6.57,91.6 10.183,87.987 R1_filtros.2
Netr_dif1_1: r_dif1.1 r_dif2.2 U1_dif.6 | length 22.4
  Bottom Layer w0.9: U1_dif.6@29.742,80.383 28.599,80.383 26.694,82.288 r_dif1.1 28.599,86.479 30.631,88.511 40.029,88.511 r_dif2.2
Netr_reg1_2: r_reg1.2 rpreset_reg.3 U2_reg1.2 | length 8.9
  Bottom Layer w0.9: U2_reg1.2 59.8,84.385 rpreset_reg.3 64.499,85.147 r_reg1.2
Netr_reg2_2: r_reg2.2 r_reg3.1 U2_reg1.6 | length 14.6
  Bottom Layer w0.9: r_reg3.1 50.402,78.289 r_reg2.2 54.085,81.972 54.085,86.036 52.688,87.433 U2_reg1.6 U2_reg1.6@51.164,87.433
NetRcomp1_clock_2: Rcomp1_clock.2 Rcomp2_clock.2 U2_clock.2 | length 20.2
  Bottom Layer w0.9: Rcomp2_clock.2 50.596,24.816 52.374,26.594 Rcomp1_clock.2 57.042,26.594 58.81,24.826 58.81,24.416 59,24.226 59,23.47 57.454,21.924 57.454,19.736 56.565,18.847 U2_clock.2
NetRup_int1_1: Rup_int1.1 U_int2.7 Ud_int1.2 Ud_int1.12 | length 84.1
  Top Layer w0.9: Rup_int1.1 29.044,45.834 30.62,47.41 41.55,47.41 48.63,40.33 v1(52.67,40.33) ; v1(54.9,67.83) 55.768,66.962 v1(60.828,66.962)
  Bottom Layer w0.9: Rup_int1.1@29.044,38.919 Rup_int1.1 29.298,39.757 U_int2.7 ; v1(52.67,40.33) 56.11,43.77 56.11,66.62 v1(54.9,67.83) ; v1(60.828,66.962) Ud_int1.2 64.372,66.272 65.532,66.272 67.382,64.422 Ud_int1.12
NetU1_clock_4: U1_clock.4 U2_clock.3 | length 61.9
  Bottom Layer w0.9: U1_clock.4 33.451,20.371 31.292,18.212 31.292,8.814 37.306,2.8 49.027,2.8 49.326,3.099 57.581,3.099 58.089,3.607 58.089,6.465 57.394,7.16 57.394,8.574 56.891,9.077 53.136,12.832 53.136,15.672 53.771,16.307 U2_clock.3
NOQ: U2_int.9 Ud_int1.8 | length 12.2
  Bottom Layer w0.9: Ud_int1.8 74.468,54.262 79.656,49.074 U2_int.9
outFAA: C2_filtros.2 J5.2 U1_filtros.1 U1_filtros.2 | length 42.9
  Bottom Layer w0.9: U1_filtros.2 U1_filtros.1 16.025,71.758 C2_filtros.2 18.61,71.459 18.61,69.88 19.72,68.77 28.244,68.77 28.264,68.79 29.796,68.79 29.816,68.77 43.39,68.77 45.02,70.4 45.02,72.79 43.458,74.352 J5.2
outFR: C3_filtros.2 U1_filtros.6 U1_filtros.7 voutBorn.2 | length 56
  Top Layer w0.9: C3_filtros.2 17.422,55.942 19.47,57.99 19.47,70.58 21.11,72.22 21.11,83.87 21.61,84.37 v1(21.61,86.09)
  Bottom Layer w0.9: U1_filtros.6 U1_filtros.7 13.485,60.443 13.896,60.032 13.896,56.615 15.517,54.994 C3_filtros.2 C3_filtros.2@18.184,54.994 ; v1(21.61,86.09) 21.61,91.12 21.55,91.18 voutBorn.2
Q: U1_int.9 Ud_int1.9 | length 12.4
  Bottom Layer w0.9: U1_int.9 64.444,49.944 69.452,54.952 69.452,55.028 70.536,56.112 70.612,56.112 Ud_int1.9
V1-: C1_int4.1 rcomp_int1.1 U2_int.1 U_int1.2 U_int1.5 | length 168.4
  Top Layer w0.9: v1(77.41,70.37) 80.75,67.03 88.02,67.03 v1(90.68,69.69)
  Bottom Layer w0.9: U_int1.5 33.235,65.411 38.315,60.331 U_int1.2 43.903,60.331 rcomp_int1.1 48.606,59.696 C1_int4.1 51.84,62.93 51.84,68.25 55.94,72.35 64.37,72.35 70.1,78.08 73.592,78.08 77.41,74.262 v1(77.41,70.37) ; U2_int.1 87.276,28.826 76.55,18.1 76.55,13.56 78.09,12.02 79.56,12.02 94.52,26.98 94.52,39.558 90.68,43.398 v1(90.68,69.69)
V2-: C1_int3.1 rcomp_int2.1 U1_int.1 U_int1.3 U_int1.6 | length 150.7
  Top Layer w0.9: C1_int3.1 29.83,65.03 31.823,67.023 46.167,67.023 v1(47.54,65.65) ; v1(76.04,79.38) 77.85,79.38 v1(87.11,70.12) ; v1(76.05,29.04) 76.467,29.04 78.407,27.1 81.94,27.1 84.71,29.87 84.71,48.5 88.14,51.93 v1(88.14,60.08)
  Bottom Layer w0.9: C1_int3.1 26.694,62.553 rcomp_int2.1 29.361,62.871 U_int1.6 U_int1.6@32.621,62.64 ; U_int1.3 46.141,62.871 47.54,64.27 v1(47.54,65.65) 47.54,66.26 57.58,76.3 65.57,76.3 68.65,79.38 v1(76.04,79.38) ; U1_int.1@72.311,29.25 U1_int.1 73.817,29.497 74.34,30.02 75.32,29.04 v1(76.05,29.04) ; v1@87.28,69.94 88.14,69.08 v1(88.14,60.08)
vcoIN: Ra_clock.1 Rb_clock.2 U1_clock.9 | length 12
  Bottom Layer w0.9: Ra_clock.1 47.548,13.132 U1_clock.9 46.528,8.31 Rb_clock.2
pads on no net: R1_clock.1 R1_filtros.1 R2_filtros.1 R3_filtros.1 R4_filtros.1 Rb_clock.1 rcomp_int1.3 rcomp_int2.3 rpreset_reg.1 U1_clock.1 U1_clock.2 U1_clock.10 U1_clock.12 U1_clock.13 U1_clock.15 U2_clock.5 U2_clock.6 U78.4 U79.4 U_int2.5 U_int2.6 Ud_int1.5 Ud_int1.6

## Keep-outs
Keep-Out Layer:
  lines w0.3: 0,0 99.42,0 99.42,99.56 99.93,100.07 0.05,100.07 0.05,0.05 0,0